# Altium PCB WCE_Battery_Bottom.PcbDoc
Units mm, origin at the board's own origin, x right, y up, seen from the top; angles counter-clockwise.
Board outline 9.5 x 9.5 mm, 4 copper layers (Top Layer, V_BAT, VDD, Bottom Layer); 3 components, 2 nets, 6 pads, 9 vias.
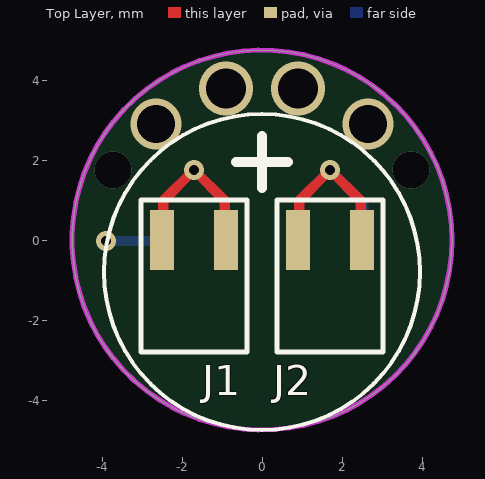
[diagram p0: Top Layer view]
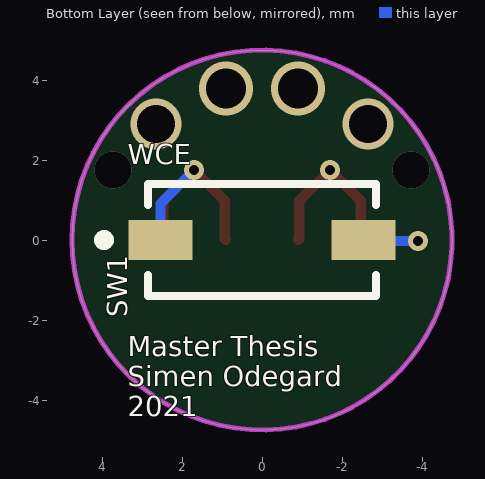
[diagram p1: Bottom Layer view, seen from below]
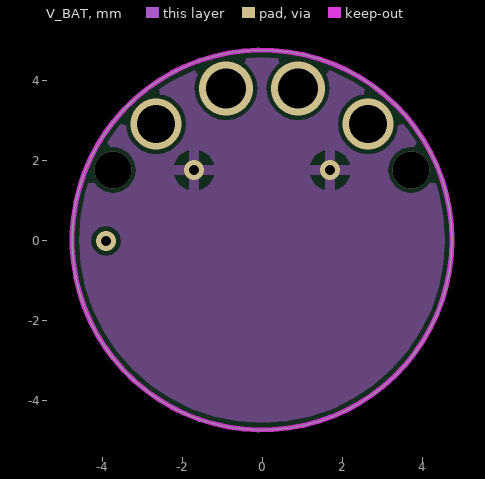
[diagram p2: V_BAT]
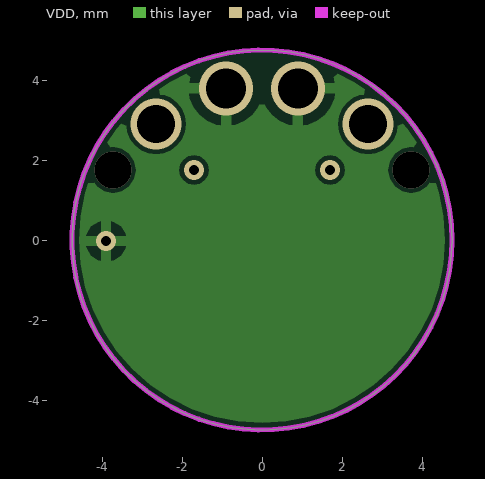
[diagram p3: VDD]

## Layer stack, top to bottom
Top Solder: solder mask 0.0102, Solder Resist, Dk 3.5
Top Layer: signal copper 0.0356
Dielectric1: core 0.32, FR-4, Dk 4.8
V_BAT: signal copper 0.0356
Dielectric2: prepreg 0.32, FR-4, Dk 4.8
VDD: signal copper 0.0356
Dielectric3: core 0.32, FR-4, Dk 4.8
Bottom Layer: signal copper 0.0356
Bottom Solder: solder mask 0.0102, Solder Resist, Dk 3.5

## Board outline
-4.75,0 ccw(c0,0) 0,-4.75 ccw(c0,0) 4.75,0 ccw(c0,0) 0,4.75 ccw(c0,0)

## Design rules (kind name [scope] priority, off if disabled: settings)
Clearance [All] p1: gap=0.11 ignorepadtopadclearanceinfootprint=FALSE
MinimumSolderMaskSliver [All] p1: minsoldermaskwidth=0.15
PolygonConnect [All] p1: connectstyle=Relief reliefconductorwidth=0.254 reliefentries=4 polygonreliefangle="90 Angle" airgapwidth=0.254
RoutingVias [All] p1: holewidth=0.125 width=0.3 viastyle="Through Hole" minholewidth=0.11 minwidth=0.25 maxholewidth=1 maxwidth=1.5
SilkToSilkClearance [All] p1: silktosilkclearance=0.15
SilkToSolderMaskClearance [IsPad] p1: minsilkscreentomaskgap=0.15 clearancetoexposedcopper=TRUE
SolderMaskExpansion [All] p1: expansion=0.102 istentingtop=FALSE
Width [All] p1: maxlimit=0.254 minlimit=0.254 preferedwidth=0.254
27 further rules are at their usual default settings.

## Components (designator, comment, footprint, x,y, rotation, side; value= is the part's Value field where it differs from the comment)
J1 "2040852-1" 2040852-1 -1.7,-1 r90 top
J2 "2040852-1" 2040852-1 1.7,-1 r90 top
SW1 "CHS-01TA" FP-CHS-01TA-MFG 0,0 r180 bottom

## Footprints (in the part's own frame and the unit in brackets; to place one, negate y for a bottom-side part, rotate by r counter-clockwise, add the part's x,y. Pads: shape width x height; smd on the part's side, far side on the other; paste and mask are expansions set on the pad)
2040852-1 [mm] "PCB Spring"
  rect 1.5x0.6 smd: 1(1,-0.8) 1(1,0.8)
  silkscreen extent -1.8,-1.33 2,1.33, body extent -1.65,-1 1.75,1, height 0.81
FP-CHS-01TA-MFG [mm]
  rect 1.6x1 smd paste+0 mask+0: 1(-2.54,0) 2(2.54,0)
  silkscreen extent -4.08,-1.4 2.85,1.4, body extent -2.8,-1.25 2.8,1.25, height 2.5

## Part data
J1 J2: "TE connectivity 2040852-1 PCB Spring Contact"
SW1: library part CMP-71740-000003-1, "SWITCH SLIDE DIP SPST 100MA 6V", Contact Current Rating=100mA, Contact Resistance=50mΩ, Manufacturer="Nidec Copal Electronics", Temperature="-40°C to +85°C", Temperature Range High=+85°C, Temperature Range Low=-40°C, Voltage Rating Dc=6V, Automotive=No, Category=Switch, ComponentLink2Description=Datasheet, ComponentLink2URL=https://www.nidec-copal-electronics.com/e/catalog/switch/chs.pdf, Device Class L1=Electromechanical, Device Class L2=Switches, Device Class L3="DIP Switches", Digikey Description="SWITCH SLIDE DIP SPST 100MA 6V", Electromechanical Life=2000Cycles, Height=2.5mm, Lead Free=Yes, Manufacturer Part Number=CHS-01TA, Mount="Surface Mount", Number Of Circuits=1, Octopart=https://octopart.com/chs-01ta-nidec+copal-52304644, Package=CHS-01TA, RoHS=TRUE, Standoff Height=0mm, Throw Configuration=SPST

## Via types
v1: diameter 0.5, hole 0.25, Top Layer to Bottom Layer, 3 vias
v2: diameter 1.35, hole 1, Top Layer to Bottom Layer, 2 vias
v3: diameter 0.92, hole 0.92, Top Layer to Bottom Layer, 2 vias
v4: diameter 1.27, hole 0.95, Top Layer to Bottom Layer, 2 vias

## Nets (pads, with @x,y where several pads share a name; then routed paths per layer and width w, separated by ;. In a path a pad name is that pad's centre, name@x,y a point inside that pad or via, vN(x,y) a via of type N, cw(c..) or ccw(c..) an arc to the next point about the centre after c; other vN are vias at no path point)
V_BAT: SW1.2 | length 1.4
  Bottom Layer w0.254: v1(-3.9,-0.025) -2.565,-0.025 SW1.2
  other v2: -0.9,3.79 0.9,3.79
V_INN: J1.1 J2.1 SW1.1 | length 10.4
  Top Layer w0.254: J1.1@-2.5,0 -2.468,0.032 -2.468,0.982 v1(-1.7,1.75) -0.932,0.982 -0.932,0.032 J1.1@-0.9,0 ; J2.1@0.9,0 0.932,0.032 0.932,0.982 v1(1.7,1.75) 2.468,0.982 2.468,0.032 J2.1@2.5,0
  Bottom Layer w0.254: v1(1.7,1.75) 2.54,0.91 SW1.1
copper on no net:
  other v3: -3.725,1.75 3.725,1.75
  other v4: -2.65,2.9 2.65,2.9

## Polygon pours and split planes (outlines as drawn)
V_INN on V_BAT "V_INN_L02_P000" (solid, pour order 0): -4.75,0 ccw(c0,0) 0,-4.75 ccw(c0,0) 4.75,0 ccw(c0,0) 0,4.75 ccw(c0,0)
V_BAT on VDD "V_BAT_L03_P001" (solid, pour order 1): -4.75,0 ccw(c0,0) 0,-4.75 ccw(c0,0) 4.75,0 ccw(c0,0) 0,4.75 ccw(c0,0)

## Keep-outs
Keep-Out Layer:
  circle w0.127: c0,0 r4.75

## Silkscreen, mask and mechanical layers (free items; w line width, h text height)
Top Overlay:
  circle w0.1: c0,-0.8 r3.95
  lines w0.254: -0.65,1.95 0.65,1.95 ; 0,1.3 0,2.6
Bottom Overlay:
  text "WCE" at 3.355,1.9 h0.5
  text "Master Thesis  / Simen Odegard / 2021" at 3.355,-4.4 h0.5